# EAGLE board PCB (EAGLE 9.7.0)
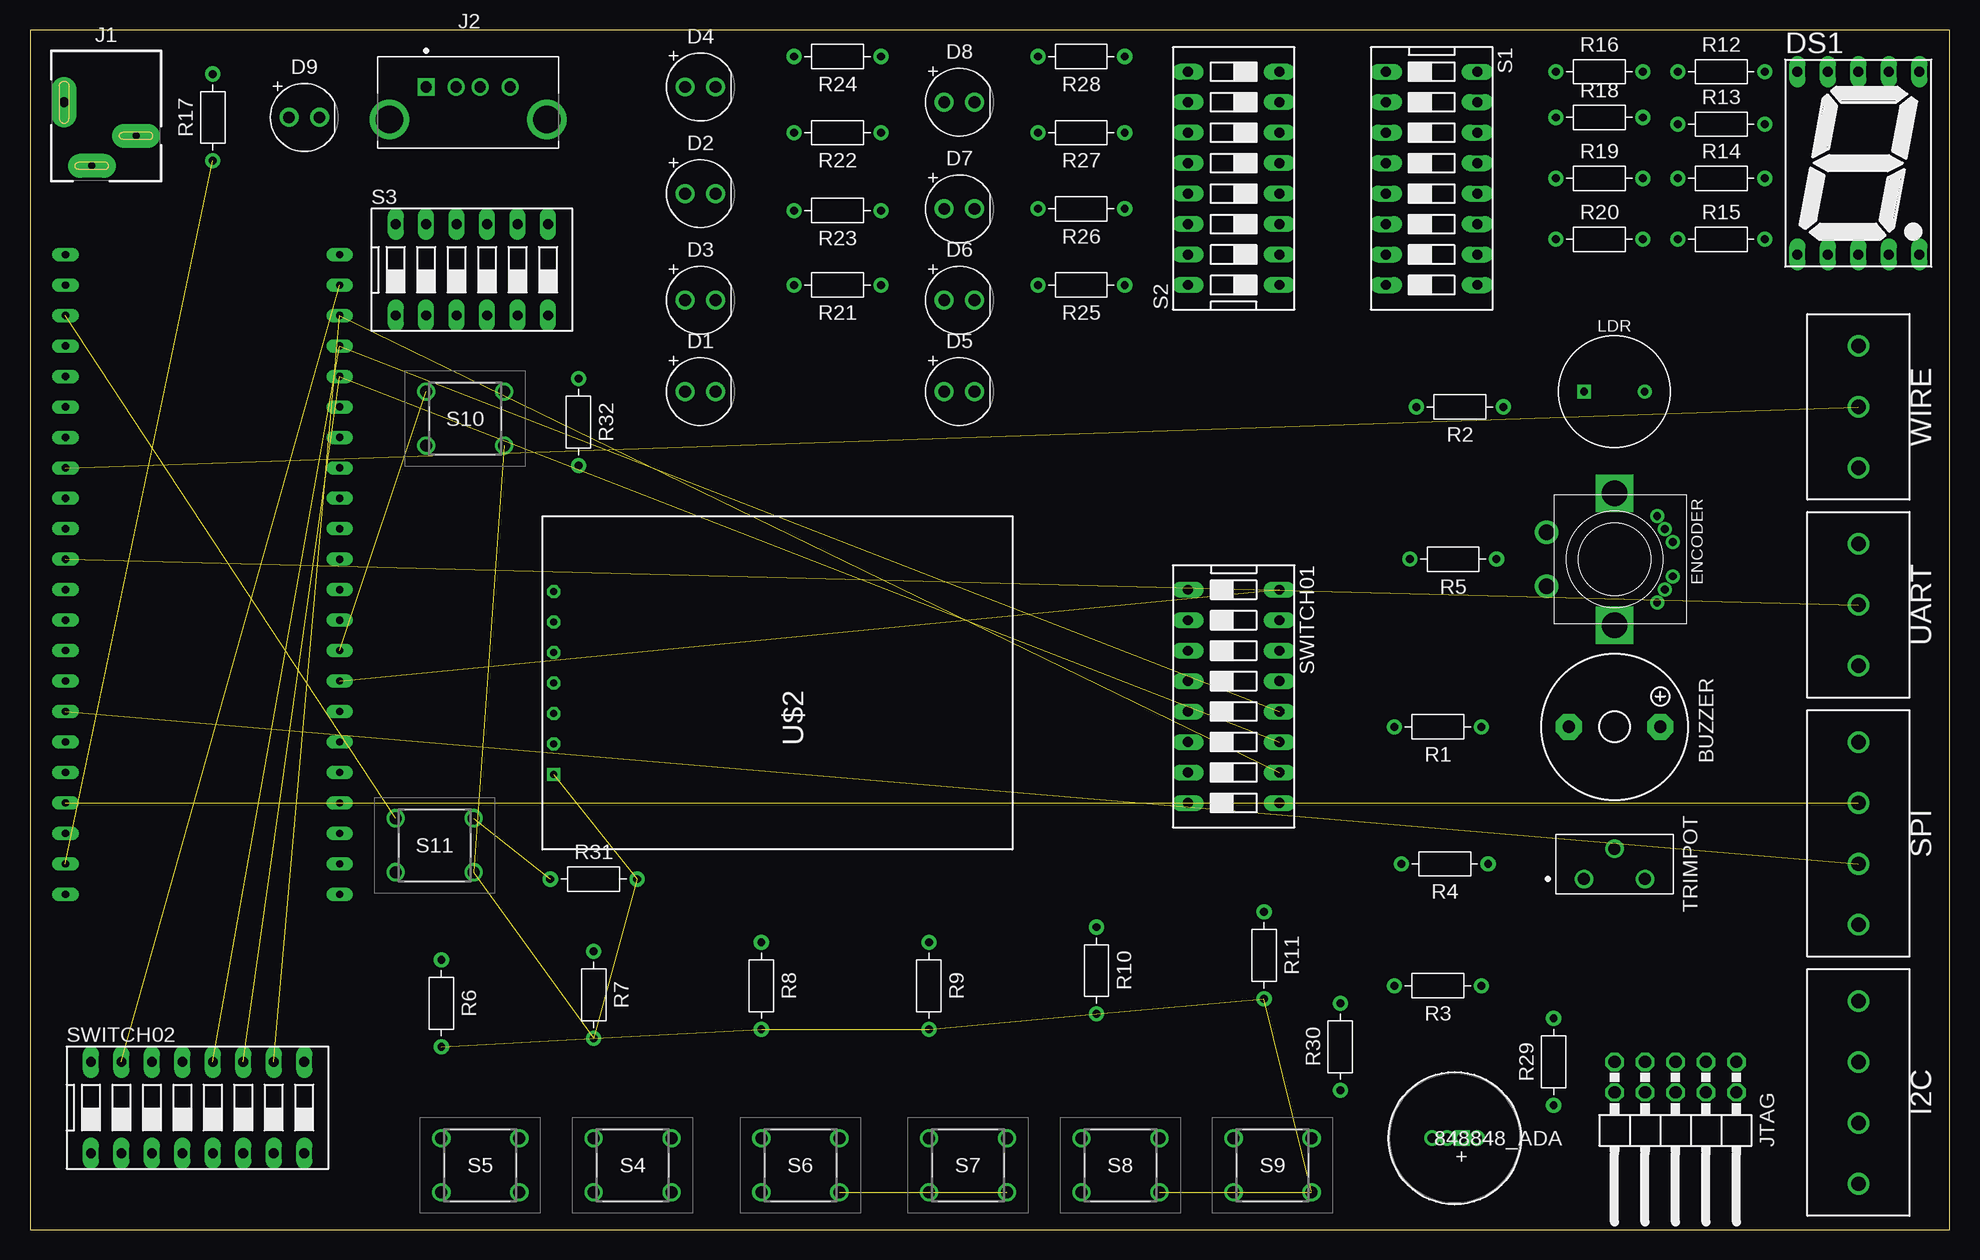
[diagram p0: board, top side]
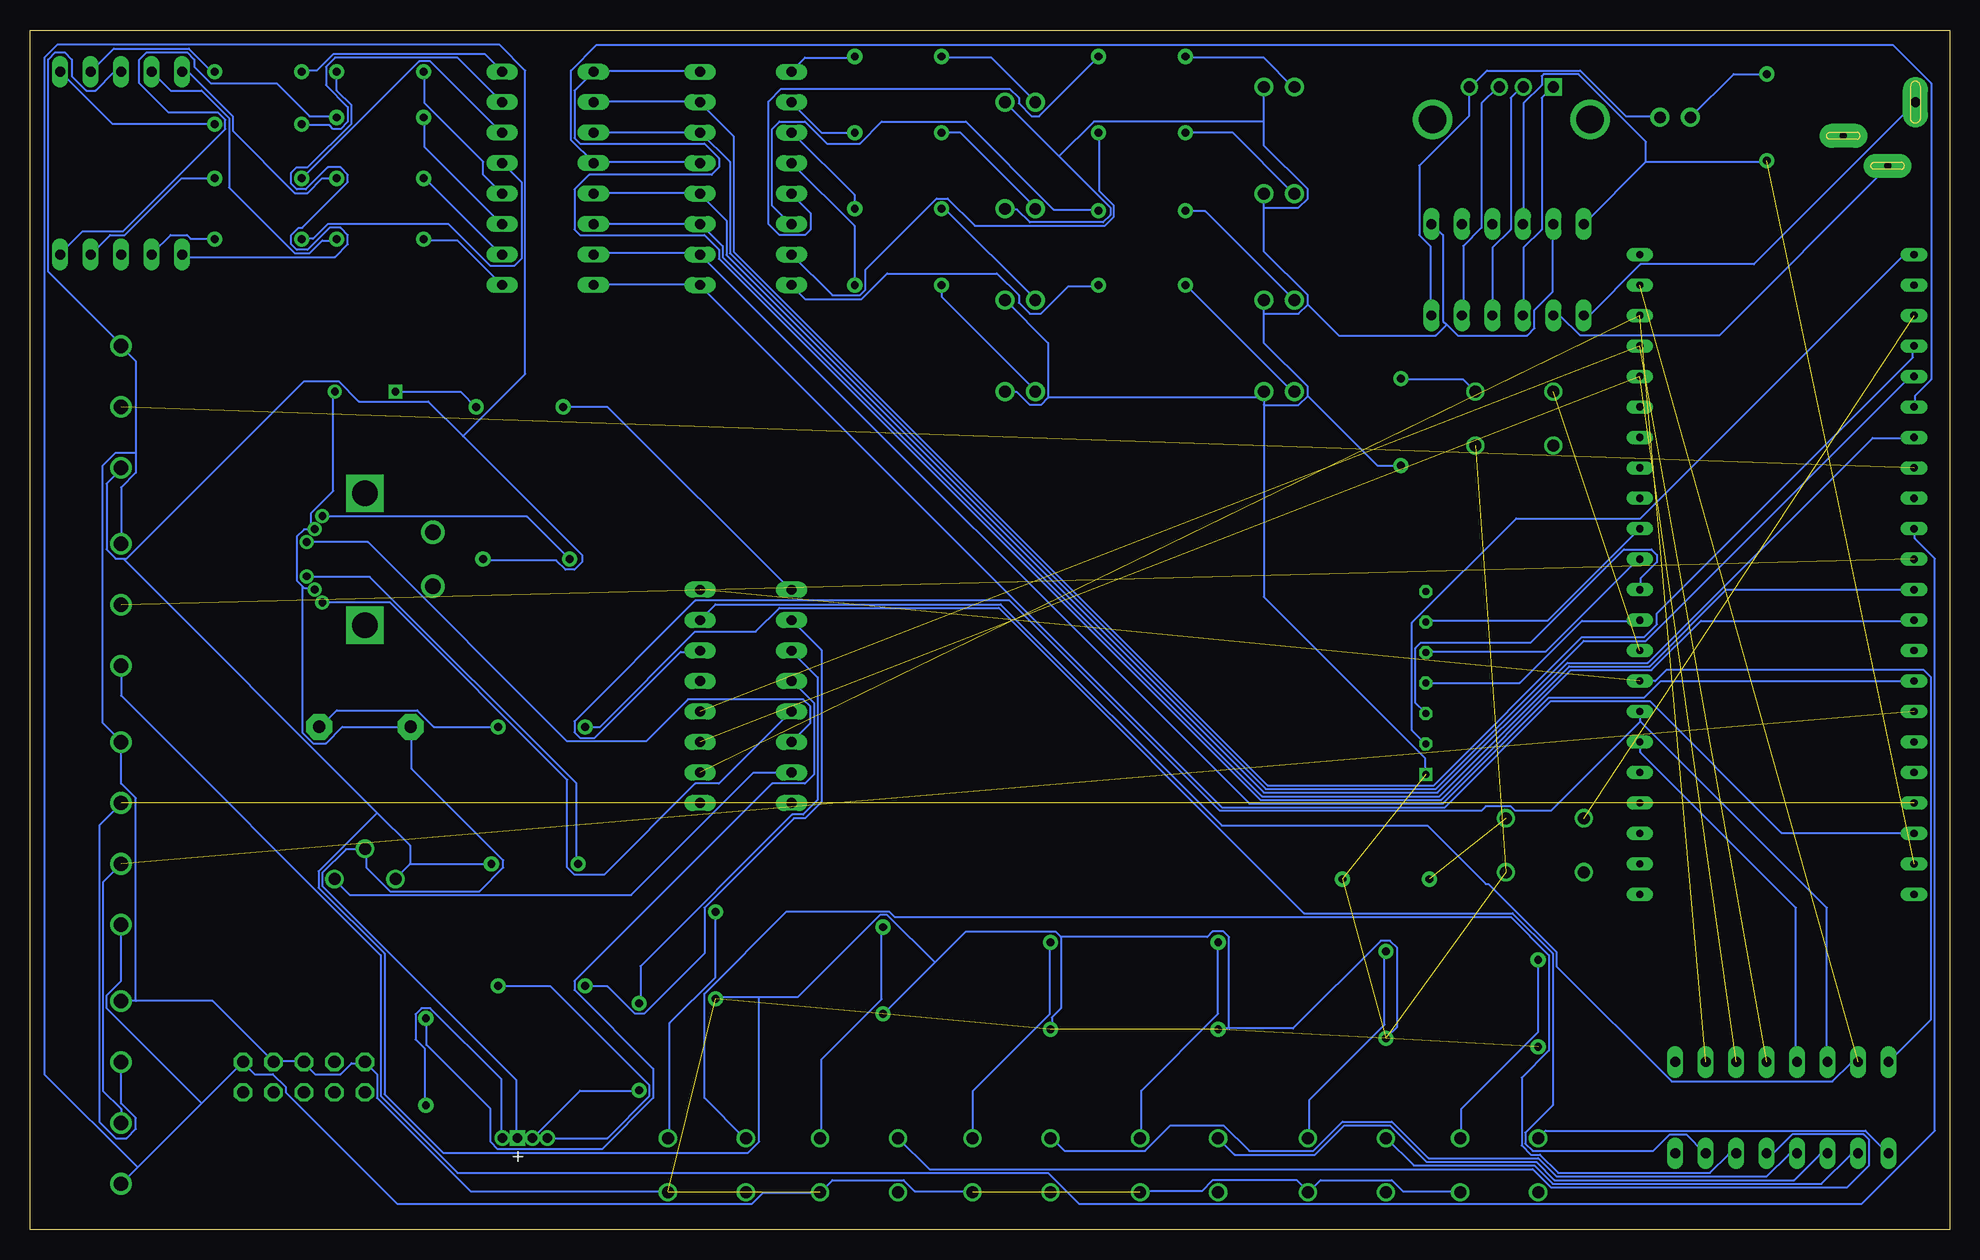
[diagram p1: board, bottom side, seen from below]

Size 160 x 100 mm. Coordinates in mm from the lower left corner, seen from the top.
Outline: 0,0 160,0 160,100 0,100 0,0
Copper layers (1*16): Top / Bottom
Stack-up Default Layer Stack: Top User Defined 0.035mm / Dielectric-1 User Defined 1.5mm / Bottom User Defined 0.035mm
Design rules "default": minimum track width 6mil, minimum drill 0.35mm, track to track 6mil, track to pad 6mil, pad to pad 6mil, via to via 6mil, smd to smd 6mil, copper to edge 40mil, drill to drill 6mil, minimum pad ring 10mil, minimum via ring 8mil, stop-mask expansion 4mil, vias tented up to drill 0mil, thermal gap 10mil

## Footprints (pad centres in the part's own frame; a part is rotated, then mirrored left to right if it is on the bottom)
F/TMB = drill 1.016 pad 2.159 octagon: + 3.81,0; - -3.81,0
LEDRD254W60D565H860B_B = drill 0.981 pad 1.581: 1 -1.27,0; 2 1.27,0
LEDRD254W60D565H860B = drill 0.981 pad 1.581: 1 -1.27,0; 2 1.27,0
7SEG-13 = drill 0.813 long: 1 -5.08,-7.62; 2 -2.54,-7.62; 3 0,-7.62; 4 2.54,-7.62; 5 5.08,-7.62; 6 5.08,7.62; 7 2.54,7.62; 8 0,7.62; 9 -2.54,7.62; 10 -5.08,7.62
EM11 = drill 0.65: A 3.608,3.55; B -1.43,4.856; GA 2.52,4.2; GB -2.52,4.2; VA 1.43,4.856; VB -3.608,3.55 | drill 2.1 square: M1 -5.5,0; M2 5.5,0 | drill 1.3: S1 2.25,-5.65; S2 -2.25,-5.65
TERMBLK_508-4N = drill 1.2: 1 0,0; 2 5.08,0; 3 10.16,0; 4 15.24,0
694106402002 = drill 0.8 pad 2.1 long: 1 -3.5,0 | drill 0.6 pad 2 long: 2 -1.2,-5.3; 3 2.5,-2.8
1734366 = drill 0.92 square: 1 0,0 | drill 0.92: 2 2.5,0; 3 4.5,0; 4 7,0 | drill 2.3: SH1 -3.07,-2.71; SH2 10.07,-2.71
2X05/90 = drill 1.016 octagon: 1 -5.08,-6.35; 2 -5.08,-3.81; 3 -2.54,-6.35; 4 -2.54,-3.81; 5 0,-6.35; 6 0,-3.81; 7 2.54,-6.35; 8 2.54,-3.81; 9 5.08,-6.35; 10 5.08,-3.81
NSL-5510 = drill 0.65 square: 1 0,0 | drill 0.65: 2 5.05,0
848_ADA = drill 0.762 pad 1.143 square: 1 0,0 | drill 0.762 pad 1.143: 2 1.25,0; 3 -1.25,0; 4 -2.5,0
RESAD724W46L381D178B = drill 0.66 pad 1.26: 1 -3.62,0; 2 3.62,0
DS-08 = drill 0.813 long: 1 -8.89,-3.81; 2 -6.35,-3.81; 3 -3.81,-3.81; 4 -1.27,-3.81; 5 1.27,-3.81; 6 3.81,-3.81; 7 6.35,-3.81; 8 8.89,-3.81; 9 8.89,3.81; 10 6.35,3.81; 11 3.81,3.81; 12 1.27,3.81; 13 -1.27,3.81; 14 -3.81,3.81; 15 -6.35,3.81; 16 -8.89,3.81
DS-06 = drill 0.813 long: 1 -6.35,-3.81; 2 -3.81,-3.81; 3 -1.27,-3.81; 4 1.27,-3.81; 5 3.81,-3.81; 6 6.35,-3.81; 7 6.35,3.81; 8 3.81,3.81; 9 1.27,3.81; 10 -1.27,3.81; 11 -3.81,3.81; 12 -6.35,3.81
13019304 = drill 1 pad 1.5: 1 0,0; 2 6.5,0; 3 0,-4.5; 4 6.5,-4.5
PV36Z = drill 1 pad 1.564: 1 0,0; 2 2.54,2.54; 3 5.08,0
ESP32-S3-DEVKITC-1 = drill 0.6 long: 0 11.43,-6.35; 1 11.43,19.05; 2 11.43,16.51; 3 -11.43,-3.81; 3.3V -11.43,24.13; 3V3 -11.43,26.67; 4 -11.43,19.05; 5 -11.43,16.51; 5V -11.43,-24.13; 6 -11.43,13.97; 7 -11.43,11.43; 8 -11.43,-1.27; 9 -11.43,-8.89; 10 -11.43,-11.43; 11 -11.43,-13.97; 12 -11.43,-16.51; 13 -11.43,-19.05; 14 -11.43,-21.59; 15 -11.43,8.89; 16 -11.43,6.35; 17 -11.43,3.81; 18 -11.43,1.27; 19 11.43,-21.59; 20 11.43,-19.05; 21 11.43,-16.51; 35 11.43,-3.81; 36 11.43,-1.27; 37 11.43,1.27; 38 11.43,3.81; 39 11.43,6.35; 40 11.43,8.89; 41 11.43,11.43; 42 11.43,13.97; 45 11.43,-8.89; 46 -11.43,-6.35; 47 11.43,-13.97; 48 11.43,-11.43; G1 -11.43,-26.67; G2 11.43,-26.67; G3 11.43,-24.13; G4 11.43,26.67; RST -11.43,21.59; RX 11.43,21.59; TX 11.43,24.13
TFT = drill 0.6 octagon: BLK 7.46,17.31; DC 4.92,17.31; RES 2.38,17.31; SCL -2.7,17.31; SDA -0.16,17.31; VCC -5.24,17.31 | drill 0.6 square: GND -7.78,17.31
TERMBLK_508-3N = drill 1.2: 1 0,0; 2 5.08,0; 3 10.16,0

## Placement (x,y rotation side)
BUZZER  F/TMB  [F/TMB]  132.08,41.91 0 top
D1  [LEDRD254W60D565H860B_B]  55.88,69.85 0 top
D2  [LEDRD254W60D565H860B_B]  55.88,86.36 0 top
D3  [LEDRD254W60D565H860B_B]  55.88,77.47 0 top
D4  [LEDRD254W60D565H860B_B]  55.88,95.25 0 top
D5  [LEDRD254W60D565H860B_B]  77.47,69.85 0 top
D6  [LEDRD254W60D565H860B_B]  77.47,77.47 0 top
D7  [LEDRD254W60D565H860B_B]  77.47,85.09 0 top
D8  [LEDRD254W60D565H860B_B]  77.47,93.98 0 top
D9  LED_RED  [LEDRD254W60D565H860B]  22.86,92.71 0 top
DS1  7SEG-CK  [7SEG-13]  152.4,88.9 0 top
ENCODER  EM11B  [EM11]  132.08,55.88 270 top
I2C  2828XX-4282837-4  [TERMBLK_508-4N]  152.4,3.81 90 top
J1  [694106402002]  6.35,93.98 0 top
J2  1734366  [1734366]  33.02,95.25 0 top
JTAG  PINHD-2X5/90  [2X05/90]  137.16,7.62 180 top
LDR  NSL-5510  [NSL-5510]  129.54,69.85 0 top
LED1  848848_ADA  [848_ADA]  119.38,7.62 0 top
R1  R-US_AXIAL-7.2MM-PITCH  [RESAD724W46L381D178B]  117.36,41.91 180 top
R2  R-US_AXIAL-7.2MM-PITCH  [RESAD724W46L381D178B]  119.19,68.58 180 top
R3  R-US_AXIAL-7.2MM-PITCH  [RESAD724W46L381D178B]  117.36,20.32 180 top
R4  R-US_AXIAL-7.2MM-PITCH  [RESAD724W46L381D178B]  117.92,30.48 180 top
R5  R-US_AXIAL-7.2MM-PITCH  [RESAD724W46L381D178B]  118.63,55.88 180 top
R6  R-US_AXIAL-7.2MM-PITCH  [RESAD724W46L381D178B]  34.29,18.86 270 top
R7  R-US_AXIAL-7.2MM-PITCH  [RESAD724W46L381D178B]  46.99,19.57 270 top
R8  R-US_AXIAL-7.2MM-PITCH  [RESAD724W46L381D178B]  60.96,20.32 270 top
R9  R-US_AXIAL-7.2MM-PITCH  [RESAD724W46L381D178B]  74.93,20.32 270 top
R10  R-US_AXIAL-7.2MM-PITCH  [RESAD724W46L381D178B]  88.9,21.59 270 top
R11  R-US_AXIAL-7.2MM-PITCH  [RESAD724W46L381D178B]  102.87,22.86 270 top
R12  [RESAD724W46L381D178B]  140.97,96.52 0 top
R13  [RESAD724W46L381D178B]  140.97,92.15 0 top
R14  [RESAD724W46L381D178B]  140.97,87.63 0 top
R15  [RESAD724W46L381D178B]  140.97,82.55 0 top
R16  [RESAD724W46L381D178B]  130.81,96.52 0 top
R17  [RESAD724W46L381D178B]  15.24,92.71 90 top
R18  [RESAD724W46L381D178B]  130.81,92.71 0 top
R19  [RESAD724W46L381D178B]  130.81,87.63 0 top
R20  [RESAD724W46L381D178B]  130.81,82.55 0 top
R21  [RESAD724W46L381D178B]  67.31,78.74 180 top
R22  [RESAD724W46L381D178B]  67.31,91.44 180 top
R23  [RESAD724W46L381D178B]  67.31,84.95 180 top
R24  [RESAD724W46L381D178B]  67.31,97.79 180 top
R25  [RESAD724W46L381D178B]  87.63,78.74 180 top
R26  [RESAD724W46L381D178B]  87.63,85.09 180 top
R27  [RESAD724W46L381D178B]  87.63,91.44 180 top
R28  [RESAD724W46L381D178B]  87.63,97.79 180 top
R29  R-US_AXIAL-7.2MM-PITCH  [RESAD724W46L381D178B]  127,13.97 90 top
R30  R-US_AXIAL-7.2MM-PITCH  [RESAD724W46L381D178B]  109.22,15.24 90 top
R31  R-US_AXIAL-7.2MM-PITCH  [RESAD724W46L381D178B]  46.99,29.21 0 top
R32  R-US_AXIAL-7.2MM-PITCH  [RESAD724W46L381D178B]  45.72,67.31 270 top
S1  DS08  [DS-08]  116.84,87.63 270 top
S2  DS08  [DS-08]  100.33,87.63 90 top
S3  DS06  [DS-06]  36.83,80.01 0 top
S4  1301.9308  [13019304]  46.99,7.62 0 top
S5  1301.9308  [13019304]  34.29,7.62 0 top
S6  1301.9308  [13019304]  60.96,7.62 0 top
S7  1301.9308  [13019304]  74.93,7.62 0 top
S8  1301.9308  [13019304]  87.63,7.62 0 top
S9  1301.9308  [13019304]  100.33,7.62 0 top
S10  1301.9308  [13019304]  33.02,69.85 0 top
S11  1301.9308  [13019304]  30.48,34.29 0 top
SPI  2828XX-4282837-4  [TERMBLK_508-4N]  152.4,25.4 90 top
SWITCH01  DS08  [DS-08]  100.33,44.45 270 top
SWITCH02  DS08  [DS-08]  13.97,10.16 0 top
TRIMPOT  [PV36Z]  129.54,29.21 0 top
U$1  ESP32-S3-DEVKITC-1  [ESP32-S3-DEVKITC-1]  14.39,54.61 0 top
U$2  DISPLAY240X240IPSTFT  [TFT]  60.96,45.72 90 top
UART  2828XX-3282837-3  [TERMBLK_508-3N]  152.4,46.99 90 top
WIRE  2828XX-3282837-3  [TERMBLK_508-3N]  152.4,63.5 90 top

## Library data of the parts
BUZZER = buzzer; OC_FARNELL: unknown; OC_NEWARK: unknown
D1-D9 = Opto-Electronic; CATEGORY: Opto-Electronic; SUB-CATEGORY: LED
DS1 = Opto-Electronic; CATEGORY: Opto-Electronic; SUB-CATEGORY: Display; TYPE: 7-Segment
ENCODER = rotary-encoder
I2C SPI = Connector; CATEGORY: Connector; DESCRIPTION: TERM BLK 4P SIDE ENT 5.08mm PCB; MANUFACTURER: TE Connectivity; MPN: 282837-4; OPERATING_TEMPERATURE: 40°C to +105°C; PART_STATUS: Active; ROHS_COMPLIANCE: RoHS Compliant; SERIES: 283737; SUBCATEGORY: Terminal Block; TYPE: Side Wire Entry
J1 = Connector; CATEGORY: Connector; DESCRIPTION: DC POWER JACK - VERTICAL - THT - 2.0 & 2.5Ø - WR-DC; MANUFACTURER: Würth Elektronik; MPN: 694106402002; OPERATING_TEMPERATURE: -40°C to +85°C; PART_STATUS: Active; ROHS_COMPLIANCE: RoHS Compliant; SERIES: WR-DC; SUBCATEGORY: Power Connector; TYPE: Vertical
J2 = Connector_USB; CATEGORY: Connector; CONTACTS: 4; CURRENT_RATING: 1A; DESCRIPTION: CONN RCPT USB2.0 TYPEA 4POS VERT; GENDER: Receptacle; MANUFACTURER: TE Connectivity; MOUNT_TYPE: Vertical; MPN: 1734366-1; OPERATING_TEMP: -40° to +80°C; PART_STATUS: Active; ROHS_COMPLIANT: RoHS Compliant; SERIES: -; SUB-CATEGORY: USB; TYPE: USB-A; VOLTAGE_RATING: 30VAC(rms)
JTAG = Connector; CATEGORY: CONNECTOR; SUB-CATEGORY: PIN-HEADER
LDR = Sensor; CATEGORY: Sensor; DESCRIPTION: The NSL-5510 is a type 5 CdS photoconductive cell in a flat lens TO-5 hermetic package.; MANUFACTURER: API; MPN: NSL-5510; OPERATING_TEMP: -60°C to 75°C; PART_STATUS: Active; ROHS_COMPLIANT: Non-Compliant; SERIES: -; SUB-CATEGORY: Photocell
LED1 = 2022-05-23_13-57-32_Library; COPYRIGHT: Copyright (C) 2022 Ultra Librarian. All rights reserved.; MANUFACTURER_PART_NUMBER: 848; MFR_NAME: Adafruit Industries
R1-R32 = Resistor; CATEGORY: Resistor; SUB-CATEGORY: Fixed
S1 S2 SWITCH01 SWITCH02 = Switch; CATEGORY: SWITCH; MPN: MCNDS-08-V; TYPE: SPST
S3 = Switch; CATEGORY: SWITCH; MPN: MCNDS-06-V; TYPE: SPST
S4-S11 = 1301.9308; DESCRIPTION: IP40 Black Button Tactile Switch, SPST-NO 3.9mm; HEIGHT: 7.3mm; MANUFACTURER_NAME: SCHURTER; MANUFACTURER_PART_NUMBER: 1301.9308; MOUSER_PART_NUMBER: 693-1301.9308; MOUSER_PRICE-STOCK: https://www.mouser.com/Search/Refine.aspx?Keyword=693-1301.9308
TRIMPOT = Resistor; CATEGORY: Resistor; DESCRIPTION: Lead Sealed Type Multiturn PV36 Series; MANUFACTURER: BOURNS; MPN: PV36Z; OPERATING_TEMPERATURE: -55 to +125 °C; PART_STATUS: Active; ROHS_COMPLIANCE: RoHS Compliant; SERIES: PV36; SUB-CATEGORY: Trimpot; TYPE: Lead Sealed
U$1 = Microcontrolador
U$2 = Display
UART WIRE = Connector; CATEGORY: Connector; DESCRIPTION: TERM BLK 3P SIDE ENT 5.08mm PCB; MANUFACTURER: TE Connectivity; MPN: 282837-3; OPERATING_TEMPERATURE: -40°C to +105°C; PART_STATUS: Active; ROHS_COMPLIANCE: RoHS Compliant; SERIES: 282837; SUBCATEGORY: Terminal Block; TYPE: Side Wire Entry

## Nets
3.3V: U$1.3.3V
3V3: U$1.3V3 U$2.VCC
5V: R17.1 S3.10 S3.12 U$1.5V
EN/RST: S11.1 U$1.RST
ESP_EN-RST: JTAG.10
G1: U$1.G1
G2: U$1.G2
G3: U$1.G3
G4: U$1.G4
GB: BUZZER.- ENCODER.GA ENCODER.GB LDR.2 LED1.1 TRIMPOT.2
GND: D1.2 D2.2 D3.2 D4.2 D5.2 D6.2 D7.2 D8.2 DS1.8 I2C.4 JTAG.3 JTAG.5 JTAG.9 R6.2 R7.2 R8.2 R9.2 R10.2 R11.2 R31.2 R32.2 S3.7 S3.11 SPI.4 U$2.GND UART.3 WIRE.3
GPIO0: S10.1 U$1.0
GPIO1: SWITCH01.12 SWITCH02.12 U$1.1
GPIO2: SWITCH01.11 SWITCH02.11 U$1.2
GPIO3: S1.1 S2.8 U$1.3
GPIO4: S1.2 S2.7 U$1.4
GPIO5: S1.3 S2.6 U$1.5
GPIO6: S1.4 S2.5 U$1.6
GPIO7: S1.5 S2.4 U$1.7
GPIO8: S1.6 S2.3 U$1.8
GPIO9: S1.7 S2.2 U$1.9
GPIO10: I2C.2 SPI.2 U$1.10
GPIO11: U$1.11
GPIO12: U$1.12
GPIO13: I2C.3 SPI.3 U$1.13
GPIO14: S1.8 S2.1 U$1.14
GPIO15: U$1.15 WIRE.2
GPIO16: U$1.16
GPIO17: U$1.17 UART.1
GPIO18: U$1.18 UART.2
GPIO19: U$1.19
GPIO20: U$1.20
GPIO21: U$1.21
GPIO35: U$1.35 U$2.SDA
GPIO36: U$1.36 U$2.SCL
GPIO37: U$1.37 U$2.RES
GPIO38: U$1.38 U$2.DC
GPIO39: U$1.39
GPIO40: U$1.40
GPIO41: U$1.41
GPIO42: U$1.42
GPIO43: SWITCH01.15 SWITCH02.15 U$1.TX
GPIO44: SWITCH01.10 SWITCH02.10 U$1.RX
GPIO45: SWITCH01.16 SWITCH02.16 U$1.45
GPIO46: U$1.46
GPIO47: SWITCH02.13 U$1.47
GPIO48: SWITCH01.14 SWITCH02.14 U$1.48
MTCLK39: JTAG.4
MTDI41: JTAG.8
MTDO40: JTAG.6
MTMS42: JTAG.2
N$1: R1.2 SWITCH02.7
N$2: R2.2 SWITCH01.1
N$3: SWITCH01.7 TRIMPOT.3
N$4: S4.3
N$5: S5.1 SWITCH02.1
N$6: R30.2 SWITCH01.3
N$7: S4.1 SWITCH02.2
N$8: S6.1 SWITCH02.3
N$9: S7.1 SWITCH02.4
N$10: SWITCH01.13
N$11: S8.1 SWITCH02.5
N$12: BUZZER.+ R1.1
N$13: LDR.1 R2.1
N$14: R29.2 SWITCH01.4
N$15: LED1.2 R29.1
N$16: ENCODER.A SWITCH01.5
N$17: ENCODER.B SWITCH01.6
N$18: S9.1 SWITCH02.6
N$19: S6.3
N$20: R6.1 S5.2
N$21: R7.1 S4.2
N$22: R8.1 S6.2
N$23: R9.1 S7.2
N$24: R10.1 S8.2
N$25: R11.1 S9.2
N$26: R3.2 SWITCH01.2
N$28: LED1.3 R30.1
N$29: LED1.4 R3.1
N$30: R32.1 S10.2
N$31: J1.1 S3.1
N$32: D1.1 R21.2
N$33: D2.1 R22.2
N$34: J1.2 S3.2
N$35: J2.1 S3.3
N$36: D9.2 J2.4 S3.6
N$37: J2.2 S3.4
N$38: J2.3 S3.5
N$39: D9.1 R17.2
N$40: D3.1 R23.2
N$41: D4.1 R24.2
N$42: D5.1 R25.2
N$43: D6.1 R26.2
N$44: D7.1 R27.2
N$45: D8.1 R28.2
N$46: R21.1 S2.16
N$47: R22.1 S2.15
N$48: R23.1 S2.14
N$49: R28.1 S2.9
N$50: R27.1 S2.10
N$51: R26.1 S2.11
N$52: R25.1 S2.12
N$53: R24.1 S2.13
N$54: DS1.7 R12.2
N$55: DS1.6 R13.2
N$56: DS1.4 R14.2
N$57: DS1.2 R15.2
N$58: DS1.1 R16.2
N$59: DS1.9 R20.2
N$60: DS1.10 R19.2
N$61: DS1.5 R18.2
N$62: R13.1 S1.15
N$63: R14.1 S1.14
N$64: R15.1 S1.13
N$65: R16.1 S1.12
N$66: R18.1 S1.11
N$67: R19.1 S1.10
N$68: R20.1 S1.9
N$69: R12.1 S1.16
N$70: S8.3
N$71: R31.1 S11.2
N$76: U$2.BLK
USB_D+: S3.8
USB_D-: S3.9
VA: ENCODER.VA R4.2
VB: ENCODER.VB R5.2
VCC: I2C.1 JTAG.1 R4.1 R5.1 S4.4 S5.4 S6.4 S7.4 S8.4 S9.4 S10.4 S11.4 SPI.1 TRIMPOT.1 WIRE.1
X: JTAG.7

## Tracks (layer width: path | path; a pad name or v marks a point on that pad's centre or on a via)
3V3
  Bottom 0.152: U$1.3V3 3.05,81.23 3.81,81.23 25.76,59.28 36.12,59.28 44.81,50.6 44.81,41.6 43.74,40.54 U$2.VCC
5V  (1 unrouted)
  Bottom 0.152: 25.3,89 15.24,89 R17.1 | S3.12 25.3,89 | 25.3,89 25.3,90.68 30.94,96.32 33.83,96.32 33.98,96.16 33.98,95.4 35.51,93.88 35.51,83.82 S3.10
EN/RST  (1 unrouted)
GB
  Bottom 0.152: 137.31,53.65 137.77,54.1 137.77,57.76 137.16,58.37 136.55,58.37 | 137.31,53.65 137.16,53.49 136.4,53.49 ENCODER.GA | 136.55,58.37 136.4,58.37 ENCODER.GB 136.55,58.37 | 136.55,58.37 136.55,59.74 134.72,61.57 134.72,69.8 LDR.2 | 137.31,53.65 137.31,41.45 136.4,40.54 135.33,40.54 133.96,41.91 BUZZER.- 128.17,41.91 128.17,38.41 120.55,30.79 120.55,30.18 122.53,28.19 130,28.19 131.98,30.18 131.98,31.7 TRIMPOT.2 132.13,31.7 133.66,31.7 135.64,29.72 135.64,28.65 119.48,12.5 119.48,7.62 LED1.1
GND  (8 unrouted)
  Bottom 0.152: 41.91,75.44 42.22,75.74 42.22,82.91 43.13,83.82 S3.7 | 41.91,75.44 41,74.52 35.2,74.52 34.59,75.13 34.59,76.66 33.07,78.18 33.07,83.82 S3.11 | D8.2 74.22,89.46 | 74.22,89.46 69.95,85.19 69.95,84.58 70.56,83.97 76.66,83.97 77.72,85.04 78.64,85.04 D7.2 | 75.13,69.34 75.74,68.73 76.66,68.73 77.72,69.8 78.64,69.8 D5.2 | 75.13,69.34 75.13,73.91 78.64,77.42 D6.2 | 57.15,69.34 D1.2 57.15,69.8 | 57.15,69.34 57.15,68.73 | 57.15,68.73 57.15,52.73 43.74,39.32 43.74,37.95 U$2.GND | 57.15,76.35 57.15,73.91 53.49,70.26 53.49,69.49 | 57.15,76.35 D3.2 | 53.49,69.49 54.25,68.73 57.15,68.73 | 57.15,85.19 57.15,81.53 53.49,77.88 53.49,77.11 | 57.15,85.19 D2.2 | 53.49,77.11 54.25,76.35 57.15,76.35 | 57.15,92.35 57.15,90.37 53.49,86.72 53.49,85.95 54.25,85.19 57.15,85.19 | 57.15,92.35 D4.2 | 57.15,69.34 75.13,69.34 | 74.22,89.46 71.32,92.35 57.15,92.35 | 41.91,75.44 42.82,74.52 50.9,74.52 53.49,77.11 | DS1.8 152.4,96.47 153.01,96.47 154.53,94.94 155.3,94.94 156.51,96.16 156.51,97.54 157.12,98.15 157.89,98.15 158.5,97.54 158.5,79.86 152.4,73.76 WIRE.3 152.4,73.61 151.18,72.39 151.18,64.77 | UART.3 152.4,61.87 151.18,63.09 151.18,64.77 | 151.18,19.05 144.78,19.05 JTAG.3 139.6,14.02 137.16,14.02 JTAG.5 137.16,13.87 136.25,12.95 134.11,12.95 133.2,13.87 132.13,13.87 JTAG.9 131.06,12.95 131.06,10.97 123.29,3.2 106.83,3.2 | 151.18,19.05 I2C.4 | 151.18,19.05 151.18,35.97 152.4,37.19 SPI.4 152.4,40.69 153.92,42.22 153.92,63.7 152.86,64.77 151.18,64.77 | 53.49,69.49 47.7,63.7 45.72,63.7 R32.2
GPIO0  (1 unrouted)
GPIO1  (2 unrouted)
GPIO2  (2 unrouted)
GPIO3
  Bottom 0.152: U$1.3 3.05,50.75 20.73,50.75 24.84,46.63 31.55,46.63 42.37,35.81 57.45,35.81 102.56,80.92 102.56,81.69 103.78,82.91 114.15,82.91 114.61,83.36 114.61,86.72 113.39,87.94 103.17,87.94 102.56,88.54 102.56,89.31 103.78,90.53 114.15,90.53 114.61,90.98 114.61,94.94 S1.1 112.93,96.62 104.24,96.62 S2.8
GPIO4
  Bottom 0.152: U$1.4 3.05,73.61 3.05,72.69 24.38,51.36 24.38,50.44 25.45,49.38 30.63,49.38 42.98,37.03 56.84,37.03 101.35,81.53 101.35,91.14 104.09,93.88 S2.7 104.24,94.03 112.93,94.03 S1.2
GPIO5
  Bottom 0.152: U$1.5 3.05,71.02 3.35,71.02 25.3,49.07 30.48,49.07 42.82,36.73 57,36.73 101.65,81.38 101.65,89 104.09,91.44 S2.6 S1.3
GPIO6
  Bottom 0.152: U$1.6 2.9,68.58 2.9,69.49 1.52,70.87 1.52,95.56 4.72,98.75 112.78,98.75 114.91,96.62 114.91,90.83 113.08,89 S1.4 112.93,89 104.24,89 S2.5
GPIO7
  Bottom 0.152: U$1.7 3.05,65.99 6.4,65.99 25.15,47.24 31.85,47.24 42.67,36.42 57.15,36.42 101.96,81.23 101.96,84.12 104.09,86.26 S2.4 104.24,86.41 112.93,86.41 S1.5
GPIO8
  Bottom 0.152: U$1.8 18.59,53.34 24.99,46.94 31.7,46.94 42.52,36.12 57.3,36.12 102.26,81.08 102.26,81.99 104.09,83.82 S2.3 S1.6
GPIO9
  Bottom 0.152: U$1.9 24.08,45.72 25.45,44.35 33.38,44.35 42.22,35.51 58.37,35.51 S2.2 104.24,81.38 112.93,81.38 S1.7
GPIO10  (1 unrouted)
  Bottom 0.152: I2C.2 152.4,10.06 153.92,11.58 153.92,28.96 SPI.2
GPIO13  (1 unrouted)
  Bottom 0.152: I2C.3 152.4,10.52 151.18,9.3 151.18,8.38 151.94,7.62 152.86,7.62 154.23,8.99 154.23,33.68 152.4,35.51 SPI.3
GPIO14
  Bottom 0.152: U$1.14 3.05,33.07 14.02,33.07 24.99,44.04 33.22,44.04 42.06,35.2 60.66,35.2 104.09,78.64 S2.1 104.24,78.79 112.93,78.79 S1.8
GPIO15  (1 unrouted)
GPIO17
  Bottom 0.152: UART.1 152.4,44.5 130.76,22.86 130.76,11.12 124.36,4.72 75.13,4.72 72.54,2.13 7.32,2.13 1.22,8.23 1.22,55.93 2.9,57.61 2.9,58.37 U$1.17
GPIO18  (1 unrouted)
GPIO35
  Bottom 0.152: U$1.35 25.91,50.75 30.63,50.75 35.81,45.57 43.59,45.57 U$2.SDA
GPIO36
  Bottom 0.152: U$1.36 25.76,53.34 25.76,54.25 24.38,55.63 24.38,56.24 24.84,56.69 27.13,56.69 34.9,48.92 44.04,48.92 44.5,48.46 44.5,43.89 43.74,43.13 U$2.SCL
GPIO37
  Bottom 0.152: U$2.RES 43.59,48.16 33.68,48.16 25.91,55.93 U$1.37
GPIO38
  Bottom 0.152: U$2.DC 43.59,50.75 33.53,50.75 25.91,58.37 U$1.38
GPIO43  (1 unrouted)
  Bottom 0.152: SWITCH02.15 7.62,13.87 8.23,13.87 9.75,12.34 23.16,12.34 32.77,21.95 32.77,23.14 38.44,28.81 38.66,28.81 43.53,33.68 60.66,33.68 79.1,52.12 102.87,52.12 104.09,50.9 SWITCH01.15
GPIO44  (2 unrouted)
GPIO45  (1 unrouted)
  Bottom 0.152: U$1.45 24.54,45.72 23.62,46.63 2.13,46.63 1.52,46.02 1.52,17.53 SWITCH02.16
GPIO47
  Bottom 0.152: U$1.47 25.76,40.54 25.76,39.78 12.8,26.82 12.8,14.02 SWITCH02.13
GPIO48
  Bottom 0.152: 25.76,42.37 25.76,43.13 U$1.48 | 25.76,42.37 10.21,26.82 10.21,14.02 SWITCH02.14 | 25.76,42.37 33.22,34.9 36.2,34.9 36.57,35.27 38.66,35.27 39.03,34.9 60.81,34.9 78.33,52.43 104.55,52.43 114.61,42.37 114.61,41.45 114.15,41 112.93,41 105.77,48.16 104.24,48.16 SWITCH01.14
N$1
  Bottom 0.152: R1.2 112.47,41.91 104.55,49.84 99.52,49.84 97.54,51.82 79.25,51.82 53.8,26.36 36.42,26.36 33.07,23.01 33.07,10.36 35.36,8.08 35.36,7.16 34.75,6.55 24.69,6.55 23.32,7.92 21.95,7.92 20.42,6.4 SWITCH02.7
N$2
  Bottom 0.152: R2.2 111.86,68.58 96.62,53.34 SWITCH01.1
N$3
  Bottom 0.152: SWITCH01.7 99.67,38.1 109.88,27.89 133.35,27.89 134.57,29.11 TRIMPOT.3
N$5
  Bottom 0.152: S5.1 33.68,8.23 7.01,8.23 5.18,6.4 SWITCH02.1
N$6
  Bottom 0.152: R30.2 109.12,18.9 109.12,21.95 96.47,34.59 95.56,34.59 94.34,35.81 94.34,46.02 96.47,48.16 SWITCH01.3
N$7
  Bottom 0.152: SWITCH02.2 7.62,6.25 8.23,6.25 10.67,3.81 33.07,3.81 34.59,5.33 44.65,5.33 46.94,7.62 S4.1
N$8
  Bottom 0.152: S6.1 59.59,6.25 52.88,6.25 50.44,8.69 46.63,8.69 43.59,5.64 34.44,5.64 32.92,4.12 12.95,4.12 10.82,6.25 10.21,6.25 SWITCH02.3
N$9
  Bottom 0.152: SWITCH02.4 12.8,6.25 13.41,6.25 15.24,4.42 32.77,4.42 34.29,5.94 43.43,5.94 46.48,8.99 50.6,8.99 53.03,6.55 58.37,6.55 60.5,8.69 64.92,8.69 67.06,6.55 73.76,6.55 74.83,7.62 S7.1
N$11
  Bottom 0.152: S8.1 85.04,5.03 34.75,5.03 33.22,3.5 8.53,3.5 6.71,5.33 6.71,7.47 7.16,7.92 13.11,7.92 14.63,6.4 15.24,6.4 SWITCH02.5
N$12
  Bottom 0.152: R1.1 126.34,41.91 127.71,43.28 134.42,43.28 135.79,41.91 BUZZER.+
N$13
  Bottom 0.152: LDR.1 129.54,69.8 124.05,69.8 122.83,68.58 R2.1
N$14
  Bottom 0.152: R29.2 126.95,17.58 126.95,15.39 121.61,10.06 121.61,7.32 121.01,6.71 112.32,6.71 108.05,10.97 108.05,13.41 114.61,19.96 114.61,20.73 98.15,37.19 95.4,37.19 94.64,37.95 94.64,43.89 96.47,45.72 SWITCH01.4
N$15
  Bottom 0.152: R29.1 127.1,10.41 127.1,15.09 127.86,15.85 127.86,17.94 127.36,18.45 126.64,18.45 120.7,12.51 120.7,7.62 LED1.2
N$16
  Bottom 0.152: ENCODER.A 135.48,52.27 130,52.27 115.21,37.49 115.21,30.18 114.61,29.57 112.17,29.57 104.55,37.19 102.56,37.19 96.62,43.13 SWITCH01.5
N$17
  Bottom 0.152: SWITCH01.6 94.94,42.22 94.94,43.59 95.56,44.2 105.16,44.2 108.66,40.69 115.21,40.69 131.83,57.3 136.85,57.3 ENCODER.B
N$18
  Bottom 0.152: SWITCH02.6 17.83,6.25 18.44,6.25 19.96,4.72 32.61,4.72 34.14,6.25 34.9,6.25 35.66,7.01 35.66,12.65 33.38,14.94 33.38,22.86 36.58,26.06 87.94,26.06 88.39,26.52 96.93,26.52 103.78,19.66 103.78,10.97 100.43,7.62 S9.1
N$20
  Bottom 0.152: R6.1 34.29,16.46 40.69,10.06 40.69,7.62 S5.2
N$21
  Bottom 0.152: R7.1 47.09,23.16 47.09,17.07 53.34,10.82 53.34,7.62 S4.2
N$22
  Bottom 0.152: R8.1 60.96,17.98 67.36,11.58 67.36,7.62 S6.2
N$23
  Bottom 0.152: R9.1 74.98,23.93 74.98,17.98 81.38,11.58 81.38,7.62 S7.2
N$24
  Bottom 0.152: R10.1 89,25.15 89,19.2 94.03,14.17 94.03,7.62 S8.2
N$25
  Bottom 0.152: R11.1 102.87,21.03 106.68,17.22 106.68,7.62 S9.2
N$26
  Bottom 0.152: SWITCH01.2 94.03,48.31 94.03,35.66 95.4,34.29 96.32,34.29 103.78,26.82 103.78,23.01 108.81,17.98 109.58,17.98 111.86,20.27 113.69,20.27 R3.2
N$28
  Bottom 0.152: R30.1 109.27,11.58 114.15,11.58 118.11,7.62 LED1.3
N$29
  Bottom 0.152: LED1.4 111.86,7.62 108.36,11.12 108.36,12.04 116.59,20.27 120.85,20.27 R3.1
N$30
  Bottom 0.152: R32.1 45.72,70.87 40.54,70.87 39.62,69.95 S10.2
N$31
  Bottom 0.152: S3.1 30.02,76.2 25.76,80.47 16.31,80.47 2.9,93.88 J1.1
N$32
  Bottom 0.152: R21.2 63.55,78.64 54.71,69.8 D1.1
N$33
  Bottom 0.152: R22.2 59.74,91.44 54.71,86.41 D2.1
N$34
  Bottom 0.152: S3.2 32.46,76.2 30.79,74.52 19.2,74.52 5.18,88.54 J1.2
N$35
  Bottom 0.152: S3.3 35.51,76.2 35.51,81.84 33.98,83.36 33.98,94.34 33.07,95.25 J2.1
N$36
  Bottom 0.152: S3.6 43.28,76.2 43.28,81.99 44.2,82.91 44.2,88.7 40.08,92.81 40.08,95.25 J2.4 39.93,95.25 38.56,96.62 30.79,96.62 26.98,92.81 24.23,92.81 D9.2
N$37
  Bottom 0.152: S3.4 38.1,81.84 36.58,83.36 36.58,94.34 35.66,95.25 J2.2
N$38
  Bottom 0.152: S3.5 40.54,76.2 40.54,81.99 39.01,83.52 39.01,93.88 37.64,95.25 J2.3
N$39
  Bottom 0.152: D9.1 17.98,96.32 15.24,96.32 R17.2
N$40
  Bottom 0.152: D3.1 62.03,84.89 63.55,84.89 R23.2
N$41
  Bottom 0.152: R24.2 63.55,97.69 57.15,97.69 54.71,95.25 D4.1
N$42
  Bottom 0.152: R25.2 83.97,78.64 83.97,77.72 76.2,69.95 D5.1
N$43
  Bottom 0.152: R26.2 83.97,85.04 83.67,85.04 76.2,77.57 D6.1
N$44
  Bottom 0.152: R27.2 82.45,91.44 76.2,85.19 D7.1
N$45
  Bottom 0.152: R28.2 83.97,97.69 79.86,97.69 76.2,94.03 D8.1
N$46
  Bottom 0.152: R21.1 71.02,78.64 73.46,78.64 75.74,76.35 76.66,76.35 77.57,77.27 77.57,77.88 79.4,79.7 88.54,79.7 90.68,77.57 95.4,77.57 96.47,78.64 S2.16
N$47
  Bottom 0.152: S2.15 93.12,77.88 90.83,77.88 90.37,78.33 90.37,80.01 84.43,85.95 83.52,85.95 81.23,83.67 70.41,83.67 69.65,84.43 69.65,85.34 70.87,86.56 70.87,91.44 R22.1
N$48
  Bottom 0.152: R23.1 71.02,85.04 74.68,85.04 81.99,92.35 89,92.35 90.83,90.53 93.57,90.53 95.4,92.35 97.54,92.35 98.15,91.75 98.15,85.34 96.62,83.82 S2.14
N$49
  Bottom 0.152: R28.1 91.29,97.69 95.4,97.69 96.47,96.62 S2.9
N$50
  Bottom 0.152: R27.1 94.03,91.44 96.47,93.88 S2.10
N$51
  Bottom 0.152: R26.1 91.29,85.19 91.29,86.26 96.47,91.44 S2.11
N$52
  Bottom 0.152: S2.12 91.29,83.67 91.29,78.79 R25.1
N$53
  Bottom 0.152: R24.1 71.02,97.69 75.89,92.81 76.5,92.81 77.57,93.88 77.57,94.34 78.33,95.1 97.38,95.1 98.45,94.03 98.45,83.82 97.54,82.91 95.4,82.91 94.94,83.36 94.94,84.73 96.47,86.26 S2.13
N$54
  Bottom 0.152: DS1.7 153.01,98.45 146.76,98.45 144.93,96.62 144.63,96.62 R12.2
N$55
  Bottom 0.152: DS1.6 153.16,92.2 144.63,92.2 R13.2
N$56
  Bottom 0.152: R14.2 147.37,87.63 152.09,82.91 153.31,82.91 DS1.4
N$57
  Bottom 0.152: R15.2 144.63,82.6 146.61,82.6 146.91,82.91 148.28,82.91 149.81,81.38 DS1.2
N$58
  Bottom 0.152: R16.2 134.42,96.47 134.42,94.94 133.2,93.73 133.2,92.2 136.85,88.54 137.77,88.54 138.23,88.09 138.23,87.17 137.77,86.72 137.01,86.72 135.18,88.54 134.11,88.54 133.5,87.94 133.5,87.33 137.31,83.52 137.62,83.52 138.23,82.91 138.23,82.14 137.77,81.69 136.85,81.69 135.03,83.52 134.11,83.52 133.5,82.91 133.5,82.14 134.57,81.08 147.07,81.08 147.22,81.23 DS1.1
N$59
  Bottom 0.152: DS1.9 148.28,94.94 145.69,94.94 143.41,92.66 143.41,86.87 137.92,81.38 136.7,81.38 135.64,82.45 134.57,82.45 R20.2
N$60
  Bottom 0.152: R19.2 135.64,87.63 136.85,86.41 137.92,86.41 143.1,91.59 143.1,92.81 146.76,96.47 147.22,96.47 DS1.10
N$61
  Bottom 0.152: R18.2 134.57,92.81 136.7,92.81 139.45,95.56 144.93,95.56 146.3,96.93 146.3,97.54 146.91,98.15 150.27,98.15 150.88,97.54 150.88,95.56 148.44,93.12 144.32,93.12 143.71,92.51 143.71,91.75 152.25,83.21 155.6,83.21 157.43,81.38 DS1.5
N$62
  Bottom 0.152: S1.15 124.36,97.69 134.57,97.69 135.33,96.93 135.33,95.4 133.5,93.57 133.5,92.35 134.11,91.75 134.72,91.75 135.03,92.05 137.31,92.05 R13.1
N$63
  Bottom 0.152: R14.1 137.31,87.63 127.56,97.38 126.64,97.38 120.7,91.44 S1.14
N$64
  Bottom 0.152: R15.1 137.31,82.6 136.4,82.6 135.18,83.82 125.12,83.82 121.61,80.31 119.63,80.31 119.02,80.92 119.02,87.33 120.55,88.85 S1.13
N$65
  Bottom 0.152: S1.12 122.22,87.94 122.22,89 127.1,93.88 127.1,96.47 R16.1
N$66
  Bottom 0.152: R18.1 127.1,92.66 127.1,90.22 120.7,83.82 S1.11
N$67
  Bottom 0.152: R19.1 127.1,87.63 120.7,81.23 S1.10
N$68
  Bottom 0.152: S1.9 124.36,82.45 127.1,82.45 R20.1
N$69
  Bottom 0.152: R12.1 137.31,96.62 136.09,96.62 134.72,97.99 122.07,97.99 120.7,96.62 S1.16
N$71  (1 unrouted)
VA
  Bottom 0.152: ENCODER.VA 136.85,54.41 131.67,54.41 114.45,37.19 114.45,30.48 R4.2
VB
  Bottom 0.152: ENCODER.VB 135.48,59.44 118.57,59.44 115.06,55.93 R5.2
VCC  (4 unrouted)
  Bottom 0.152: 74.83,16.76 74.83,17.68 74.07,18.44 74.07,24.38 | 74.07,24.38 74.52,24.84 81.99,24.84 84.58,22.25 | 88.85,17.98 84.58,22.25 | 99.21,19.36 96.01,19.36 89.15,26.21 88.54,26.21 84.58,22.25 | 99.21,19.36 102.87,19.36 | 60.05,16.76 54.71,16.76 47.4,24.08 46.63,24.08 46.02,23.47 46.02,16.92 46.94,16 | 60.05,16.76 60.96,16.76 | 74.07,24.38 61.87,24.38 61.42,24.84 60.5,24.84 60.05,24.38 60.05,16.76 | I2C.1 151.03,5.18 | 151.03,5.18 145.69,10.52 | 145.69,10.52 JTAG.1 142.19,13.87 141.28,12.95 139.75,12.95 138.68,11.89 138.68,11.43 129.39,2.13 99.82,2.13 98.91,3.05 94.18,3.05 S8.4 94.03,3.2 93.12,4.12 87.17,4.12 86.26,3.2 81.53,3.2 S7.4 | SPI.1 152.4,20.73 153.62,19.51 153.62,18.44 145.69,10.52 | 128.32,30.48 R4.1 | 128.32,30.48 129.54,29.26 TRIMPOT.1 | 123.9,66.14 126.8,69.04 132.59,69.04 134.26,70.71 137.16,70.71 151.94,55.93 152.25,55.93 | 123.9,66.14 114,56.24 114,55.63 114.61,55.02 115.37,55.02 116.13,55.78 122.22,55.78 R5.1 | 152.25,55.93 152.86,55.93 153.62,56.69 153.62,62.18 152.4,63.4 WIRE.1 | 128.32,30.48 128.32,32 131.06,34.75 | 152.25,55.93 131.06,34.75 | 151.03,5.18 158.8,12.95 158.8,97.69 157.73,98.75 120.85,98.75 118.72,96.62 118.72,71.32 123.9,66.14 | 99.21,19.36 99.21,7.32 100.13,6.4 125.58,6.4 130.45,11.28 130.45,23.01 135.94,28.5 135.94,29.87 131.06,34.75 | S5.4 40.84,3.2 45.57,3.2 46.48,4.12 52.43,4.12 53.34,3.2 S4.4 53.49,3.2 54.41,4.12 61.42,4.12 62.33,3.2 67.36,3.2 S6.4